# Altium PCB PCB.PcbDoc
Units mm, origin at the board's own origin, x right, y up, seen from the top; angles counter-clockwise.
Board outline 85.09 x 55.88 mm, 2 copper layers (Top Layer, Bottom Layer); 11 components, 11 nets, 57 pads, 23 vias.
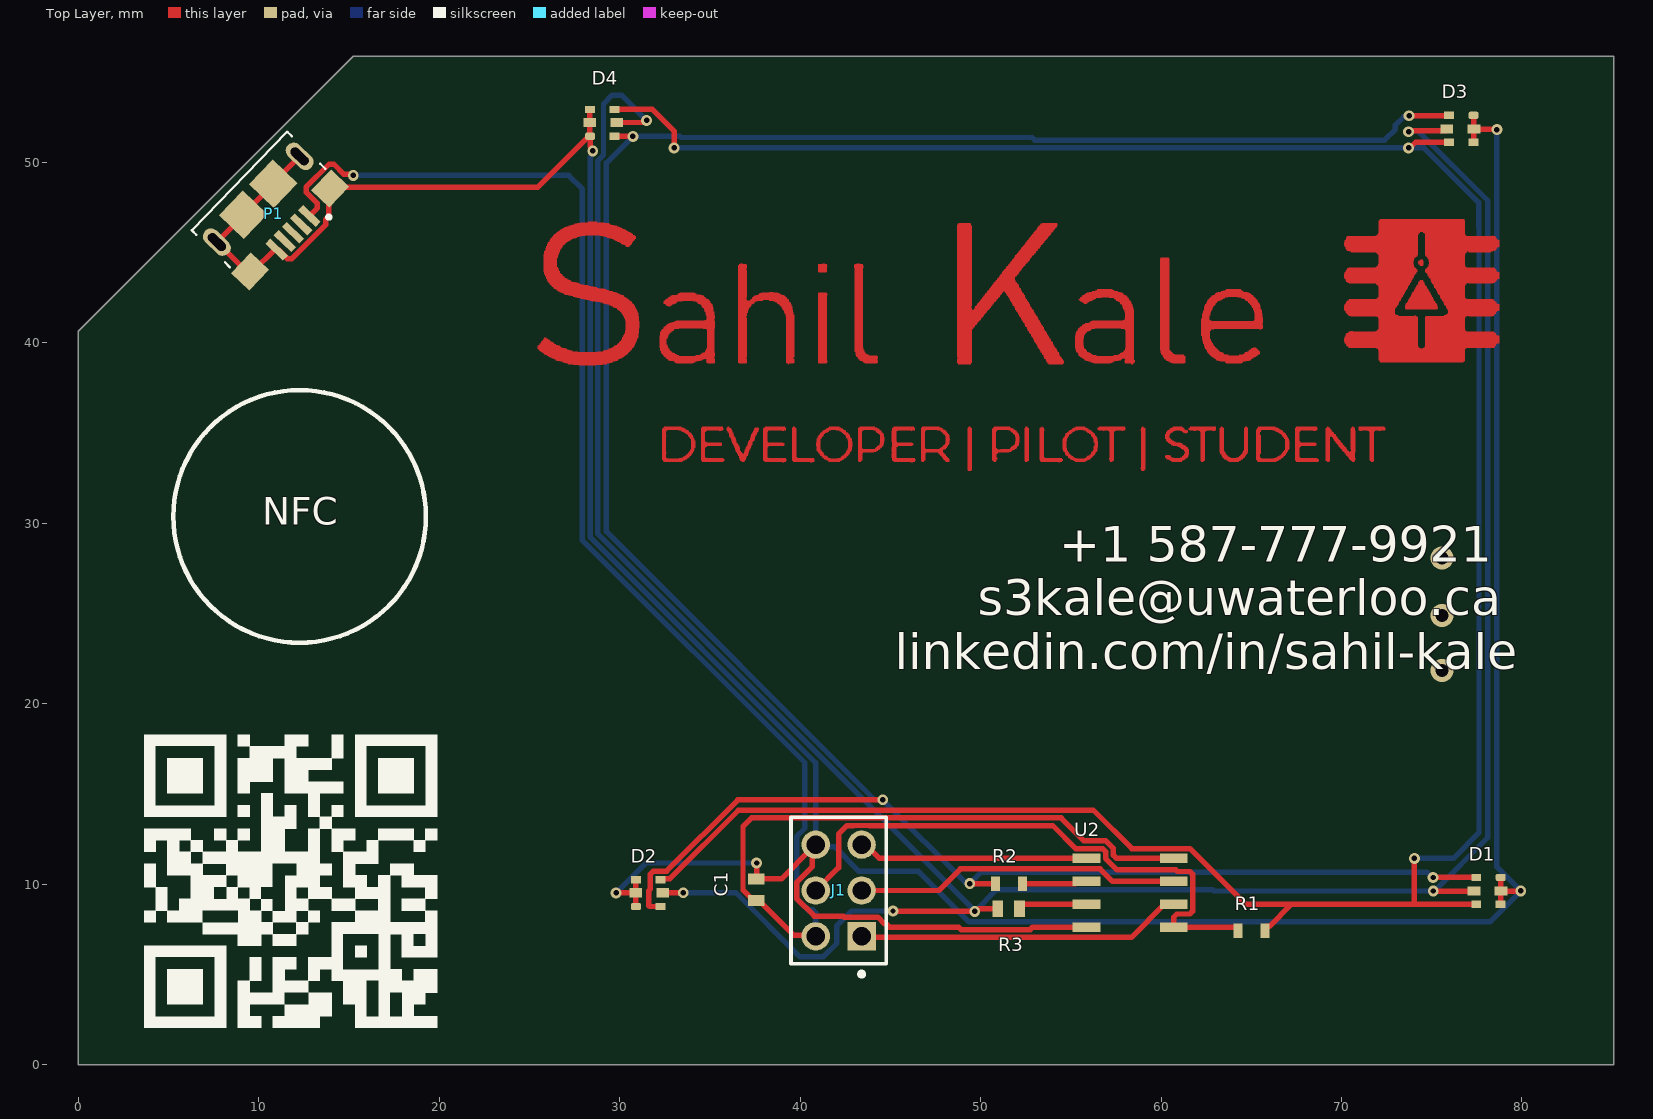
[diagram p0: Top Layer view]
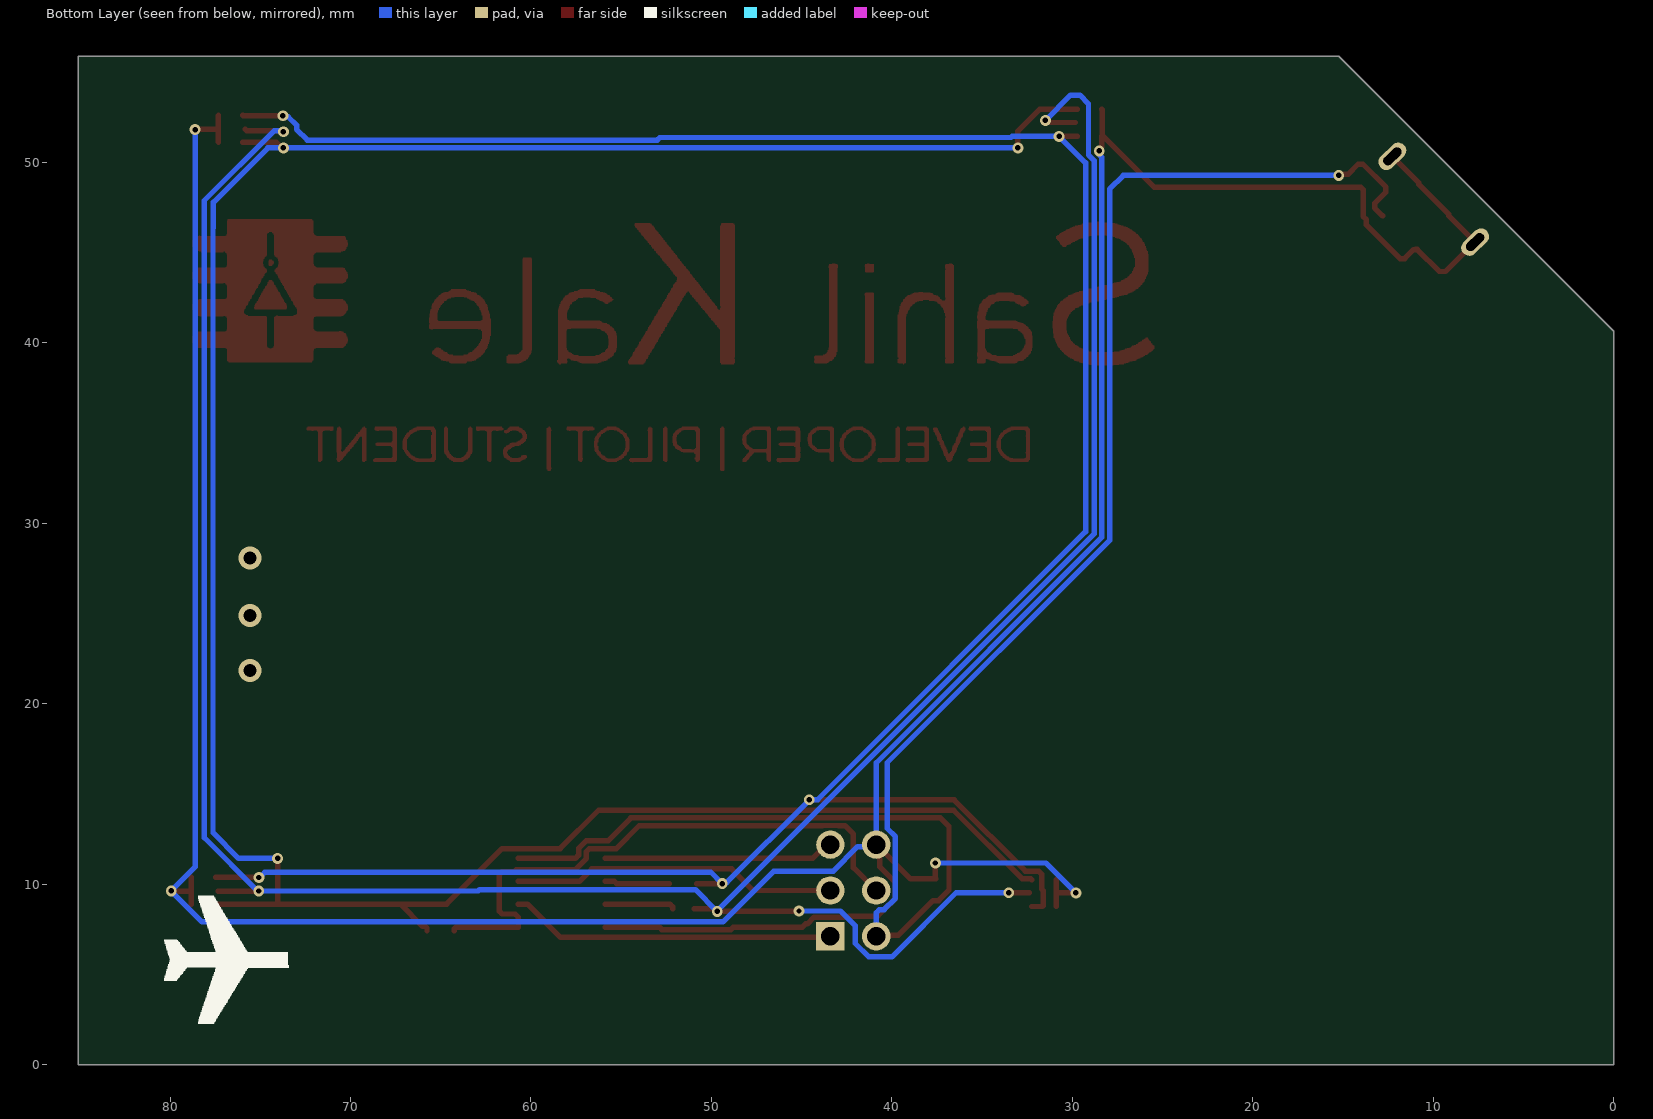
[diagram p1: Bottom Layer view, seen from below]
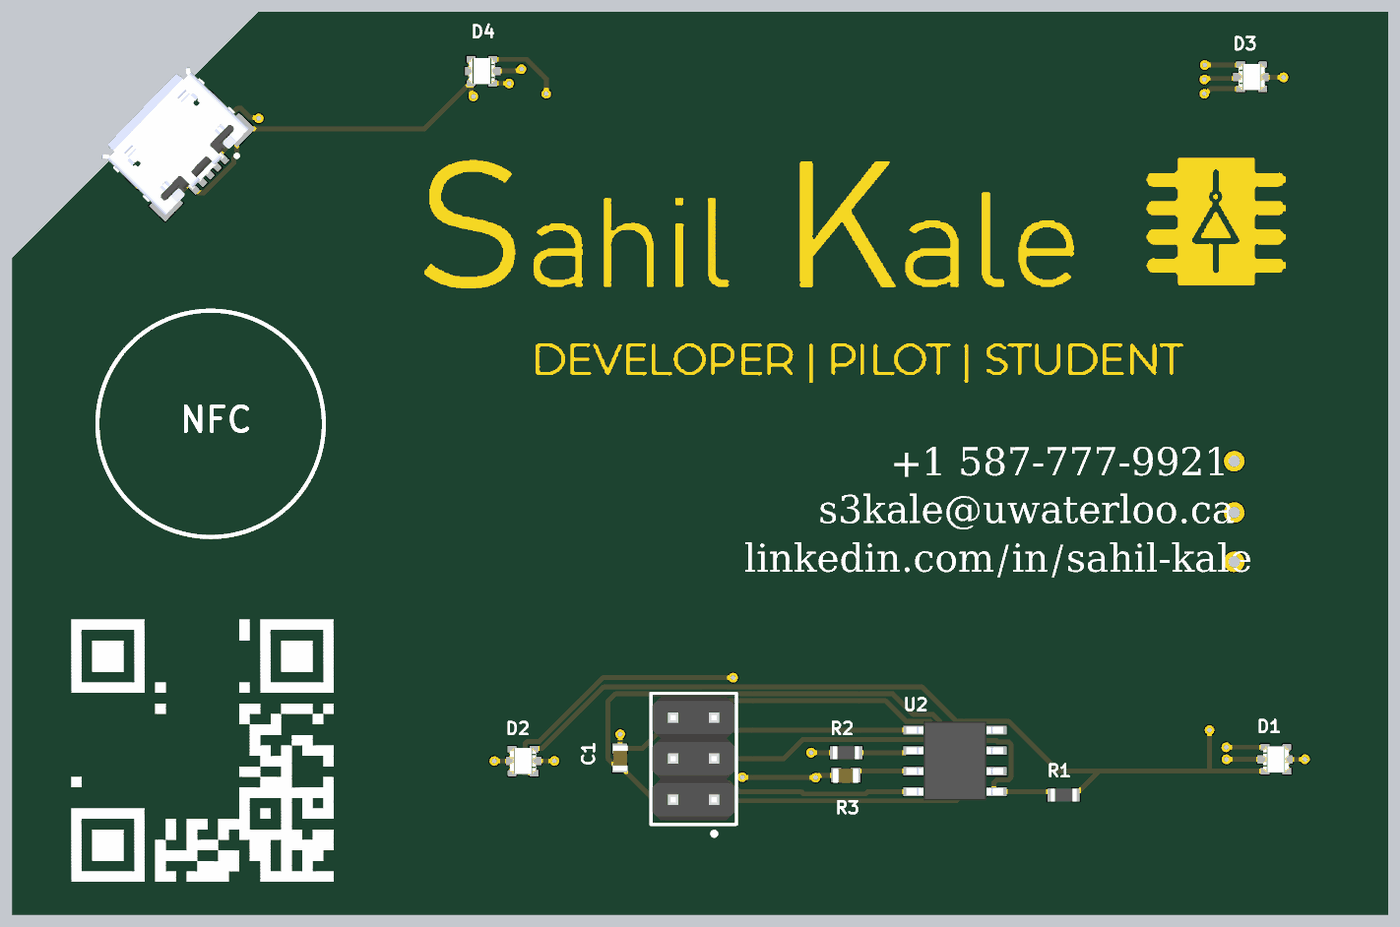
[diagram p2: 3D render of the assembled board from above, using the file's embedded part models]

## Layer stack, top to bottom
Top Solder: solder mask 0.0102, Solder Resist, Dk 3.5
Top Layer: signal copper 0.0356
Dielectric 1: dielectric 0.32, FR-4, Dk 4.8
Bottom Layer: signal copper 0.0356
Bottom Solder: solder mask 0.0102, Solder Resist, Dk 3.5

## Board outline
85.09,0 0,0 0,40.64 15.24,55.88 85.09,55.88

## Design rules (kind name [scope] priority, off if disabled: settings)
BoardOutlineClearance [All] p1: gap=0.2 ignorepadtopadclearanceinfootprint=FALSE
Clearance [All] p1: gap=0.127 ignorepadtopadclearanceinfootprint=FALSE except(0.25: Arc-Hole Track-Hole SMDPad-Hole THPad-Hole Via-Hole Fill-Hole Poly-Hole Region-Hole Text-Hole)
ComponentClearance [All] p1: gap=0.127 collisioncheckmode=3 verticalgap=0.127 showdistances=TRUE
DiffPairsRouting [All] p1: maxlimit=0.254 minlimit=0.127 mostfreqgap=0.127 toplayer_minwidth=0.127 toplayer_maxwidth=25.4 toplayer_prefwidth=0.127 bottomlayer_minwidth=0.127 bottomlayer_maxwidth=25.4 bottomlayer_prefwidth=0.127 maxuncoupledlength=12.7
Height [All] p1: minheight=0 maxheight=1816.048 prefheight=12.7
HoleSize [All] p1: absolutevalues=TRUE maxlimit=6.3 minlimit=0.3 maxpercent=80.000 minpercent=20.000
HoleToHoleClearance [All] p1: gap=0.25 allowstackedmicrovias=FALSE
MinimumAnnularRing [All] p1: minimumring=0.076
MinimumSolderMaskSliver [All] p1: minsoldermaskwidth=0
PlaneClearance [All] p1: clearance=0.127
PlaneConnect PlaneConnectPowerPads [InPadClass('PowerPads')] p1: planeconnectstyle=Direct reliefexpansion=0.508 reliefentries=4 reliefconductorwidth=0.254 reliefairgap=0.254
PlaneConnect [All] p2: pad.planeconnectstyle=Relief pad.reliefexpansion=0.3 pad.reliefentries=4 pad.reliefconductorwidth=0.127 pad.reliefairgap=0.127 via.planeconnectstyle=Direct via.reliefexpansion=0.3 via.reliefentries=4 via.reliefconductorwidth=0.127 via.reliefairgap=0.127
PolygonConnect PolygonConnectPowerPads [All vs (InPadClass('PowerPads'))] p1: connectstyle=Direct reliefconductorwidth=0.254 reliefentries=4 polygonreliefangle="90 Angle" airgapwidth=0.254
PolygonConnect [All] p2: thpad.connectstyle=Relief thpad.reliefconductorwidth=0.127 thpad.reliefentries=4 thpad.polygonreliefangle="90 Angle" thpad.airgapwidth=0.127 smdpad.connectstyle=Relief smdpad.reliefconductorwidth=0.127 smdpad.reliefentries=4 smdpad.polygonreliefangle="90 Angle" smdpad.airgapwidth=0.127 via.connectstyle=Direct via.reliefconductorwidth=0.127 via.reliefentries=4 via.polygonreliefangle="90 Angle" via.airgapwidth=0.127
RoutingVias [All] p1: holewidth=0.3 width=0.6 viastyle="Through Hole" minholewidth=0.3 minwidth=0.6 maxholewidth=0.6 maxwidth=6.6
SilkToSilkClearance [All] p1: silktosilkclearance=0
SilkToSolderMaskClearance [IsPad] p1: minsilkscreentomaskgap=0.127 clearancetoexposedcopper=TRUE
SolderMaskExpansion [All] p1: expansion=0.075 istentingtop=FALSE
Width [All] p1: maxlimit=25.4 minlimit=0.127 preferedwidth=0.127 minimp=50.000000 maximp=50.000000 favimp=50.000000
20 further rules are at their usual default settings.

## Classes and differential pairs
component class "SH1 - Main": C1 D1 D2 D3 D4 J1 R1 R2 R3 U2

## Components (designator, comment, footprint, x,y, rotation, side; value= is the part's Value field where it differs from the comment)
C1 "0603" 0603 37.567,10.293 r270 top
D1 "RGB LED" 19-337C/RSBHGHC-A88/4T 77.47,10.377 r0 top
D2 "RGB LED" 19-337C/RSBHGHC-A88/4T 32.258,8.763 r180 top
D3 "RGB LED" 19-337C/RSBHGHC-A88/4T 75.968,52.603 r0 top
D4 "RGB LED" 19-337C/RSBHGHC-A88/4T 29.718,51.447 r180 top
J1 "M20-9980346" FP-M20-9980346-MFG 42.139,9.652 r90 top
P1 "Micro Type B" FCI_10118193-0001LF 10.94,47.026 r226 top
R1 "0603" SDR03EZPJ200 64.262,7.417 r0 top
R2 "0603" SDR03EZPJ200 52.324,10.033 r180 top
R3 "0603" 0603 52.152,8.636 r180 top
U2 "ATTiny85" SOIC127P798X216-8N 55.88,11.43 r0 top

## Footprints (in the part's own frame and the unit in brackets; to place one, negate y for a bottom-side part, rotate by r counter-clockwise, add the part's x,y. Pads: shape width x height; smd on the part's side, far side on the other; paste and mask are expansions set on the pad)
19-337C/RSBHGHC-A88/4T [mm]
  rrect50% 0.55x0.4 smd: 1(1.35,0)
  rect 0.55x0.4 smd: 2(0,0) 5(1.35,-1.487) 6(0,-1.487)
  rect 0.7x0.5 smd: 3(1.373,-0.762) 4(-0.127,-0.762)
  body extent -0.13,-1.56 1.47,0.04, height 0.5
0603 [mm]
  rect 0.6x0.9 smd: 1(0,0) 2(1.2,0)
  body extent -0.19,-0.42 1.41,0.48, height 0.78
FCI_10118193-0001LF [mm]
  rect 0.4x1.35 smd: 1(-1.3,1.337) 2(-0.65,1.337) 3(0,1.338) 4(0.65,1.337) 5(1.3,1.337)
  rect 1.6x1.4 smd: S1(-3.2,1.113) S2(3.2,1.113)
  rect 1.9x1.9 smd: S3(1.2,-1.338) S4(-1.2,-1.338)
  oval 0.9x1.8 hole 0.5 slot 1.2 at 90 deg: S5(-3.3,-1.338) S6(3.3,-1.338)
  silkscreen extent -3.8,-2.79 3.8,2.26, body extent -3.94,-4.07 3.92,1.64, height 2.8
FP-M20-9980346-MFG [mm]
  rect 1.57x1.57 hole 1.02 paste-1000 mask+0: 1(-2.54,-1.27)
  round 1.57 hole 1.02 paste-1000 mask+0: 2(-2.54,1.27) 3(0,-1.27) 4(0,1.27) 5(2.54,-1.27) 6(2.54,1.27)
  silkscreen extent -4.76,-2.64 4.06,2.64, body extent -4.16,-2.74 4.16,2.74, height 0.25
SDR03EZPJ200 [mm]
  rect 0.5x0.8 smd: 1(0,0) 2(1.5,0)
  body extent -0.04,-0.4 1.56,0.4, height 0.55
SOIC127P798X216-8N [mil]
  rect 61x21 smd: 1(0,0) 2(0,-50) 3(0,-100) 4(0,-150) 5(190,-150) 6(190,-100) 7(190,-50) 8(190,0)
  body extent -23,-171 213,21, height 69

## Part data
C1: library part "CAP 0.1uF", "Ceramic Capacitor, Multilayer, Ceramic, 16V, 10% +Tol, 10% -Tol, X5R, 15% TC, 0.1uF, Surface Mount, 0603", Capacitance=100nF, Capacitor Type=Ceramic, Manufacturer="Taiyo Yuden", Manufacturer Part Number=EMK107BJ104KAHT, Max Operating Temperature=85°C, Min Operating Temperature=-55°C, Negative Tolerance=10%, Package Shape=Rectangular, Package Style=SMTMeter, Rated DC Voltage (URdc)=16V, Supplier Part Number 1=587-3308-1-ND, Temperature Characteristics Code=X5R, Category="Ceramic Capacitors", ComponentLink1Description=https://datasheet.ciiva.com:443/pdfs/VipMasterIC/IC/TAIY/TAIY-S-A0009098652/TAIY-S-A0009098054-1.pdf?src-supplier=IHS+Markit, ComponentLink1URL=https://datasheet.ciiva.com:443/pdfs/VipMasterIC/IC/TAIY/TAIY-S-A0009098652/TAIY-S-A0009098054-1.pdf?src-supplier=IHS+Markit, ComponentLink2Description=http://www.mouser.com/ds/2/396/mlcc11_hq_e-541564.pdf?src-supplier=Mouser, ComponentLink2URL=http://www.mouser.com/ds/2/396/mlcc11_hq_e-541564.pdf?src-supplier=Mouser, ComponentLink3Description=http://ds.yuden.co.jp/TYCOMPAS/ut/detail.do?productNo=EMK107BJ104KAHT&fileName=EMK107BJ104KAHT_SS&mode=specSheetDownload&src-supplier=Digi-Key, ComponentLink3URL=http://ds.yuden.co.jp/TYCOMPAS/ut/detail.do?productNo=EMK107BJ104KAHT&fileName=EMK107BJ104KAHT_SS&mode=specSheetDownload&src-supplier=Digi-Key, ComponentLink4Description=http://www.yuden.co.jp/ut/product/category/capacitor/putpdf/EMK107BJ104KAHT.pdf?src-supplier=Avnet, ComponentLink4URL=http://www.yuden.co.jp/ut/product/category/capacitor/putpdf/EMK107BJ104KAHT.pdf?src-supplier=Avnet, Dielectric Material=Ceramic, Height=0.8mm, Length=1.6mm, Mount="Surface Mount", Multilayer=Yes, Number of Pins=2, Packaging="Tape and Reel", Positive Tolerance=10%, Reference Standard=AEC-Q200, RoHS=Yes, Size Code=0603, Stock 1=65712, Supplier 1=Digi-Key, Termination=Wraparound, Width=0.8mm
D1 D2 D3 D4: library part LED_RGB, "Tri Color Pcb Top View SMD Led R", Manufacturer=Everlight, Manufacturer Part Number=19-337C/RSBHGHC-A88/4T, Supplier Part Number 1=1080-1631-1-ND, Category=LEDs, Pricing 1="1=0.40000, 10=0.24400, 100=0.14030, 1000=0.10980, 2000=0.10065 (USD)", RoHS=No, Stock 1=109225, Supplier 1=Digi-Key
J1: library part CMP-2000-06636-2, "CONN HEADER VERT 6POS 2.54MM", Current Rating=3A, Manufacturer=Harwin, Temperature="-40°C to +105°C", Temperature Range High=+105°C, Temperature Range Low=-40°C, Automotive=No, Category=Conn, ComponentLink2Description=Datasheet, ComponentLink2URL=https://cdn.harwin.com/pdfs/M20-998.pdf, Conn Gender=Male, Conn Orientation=Vertical, Contact Material=Tin,Nickel, Device Class L1=Connectors, Device Class L2="Headers and Wire Housings", Device Class L3=unset, Digikey Description="CONN HEADER VERT 6POS 2.54MM", Height=8.99mm, Lead Free=Yes, Manufacturer Part Number=M20-9980346, Mouser Description="2.54mm (0.1\") Pitch DIL Vertical PC Tail Pin Header, 6.1mm mating pin height, tin, 3+3 contacts", Number of Contacts=6, Number of Rows=2, Octopart=https://octopart.com/m20-9980346-harwin-5436545, Package=M20-9980346, Pitch=2.54mm, RoHS=TRUE
P1: library part "USB Connector", "USB Connector, 5 Contact(s), Female, Right Angle, Solder Terminal, Locking, Receptacle", Contact Resistance=30mR, Flammability Rating="UL94 V-0", Insulation Resistance=1GR, Manufacturer="Amphenol FCI", Manufacturer Part Number=10118193-0001LF, Manufacturer Series=10118193, Rated Current (Signal)=1.8A, Supplier Part Number 1=609-4616-1-ND, Board Mounting Option="LOCATING POSTS", Body Breadth=0.122inch, Body Depth=0.199inch, Body Length=0.309inch, Body/Shell Style=RECEPTACLE, Category="USB Connectors", ComponentLink1Description=https://datasheet.ciiva.com:443/pdfs/VipMasterIC/IC/FRCI/FRCI-S-A0000088532/FRCI-S-A0001133856-1.pdf?src-supplier=IHS+Markit, ComponentLink1URL=https://datasheet.ciiva.com:443/pdfs/VipMasterIC/IC/FRCI/FRCI-S-A0000088532/FRCI-S-A0001133856-1.pdf?src-supplier=IHS+Markit, ComponentLink2Description=https://datasheet.ciiva.com/851/10118193-851106.pdf?src-supplier=Digi-Key, ComponentLink2URL=https://datasheet.ciiva.com/851/10118193-851106.pdf?src-supplier=Digi-Key, ComponentLink3Description=https://datasheet.ciiva.com/26853/getdatasheetpartid-418618-26853893.pdf?src-supplier=Verical, ComponentLink3URL=https://datasheet.ciiva.com/26853/getdatasheetpartid-418618-26853893.pdf?src-supplier=Verical, ComponentLink4Description=https://datasheet.ciiva.com/4598/10118193ac-197151-4598799.pdf?src-supplier=Mouser, ComponentLink4URL=https://datasheet.ciiva.com/4598/10118193ac-197151-4598799.pdf?src-supplier=Mouser, ComponentLink5Description=https://datasheet.ciiva.com/14802/10118193-0001lf-webpage-14802386.pdf?src-supplier=Arrow+Electronics, ComponentLink5URL=https://datasheet.ciiva.com/14802/10118193-0001lf-webpage-14802386.pdf?src-supplier=Arrow+Electronics, ComponentLink6Description=https://datasheet.ciiva.com/851/10118193-851107.pdf?src-supplier=Digi-Key, ComponentLink6URL=https://datasheet.ciiva.com/851/10118193-851107.pdf?src-supplier=Digi-Key, ComponentLink7Description=https://datasheet.ciiva.com/851/10118193-851108.pdf?src-supplier=Digi-Key, ComponentLink7URL=https://datasheet.ciiva.com/851/10118193-851108.pdf?src-supplier=Digi-Key, ComponentLink8Description=https://datasheet.ciiva.com/14618/70236827-14618887.pdf?src-supplier=Allied+Electronics, ComponentLink8URL=https://datasheet.ciiva.com/14618/70236827-14618887.pdf?src-supplier=Allied+Electronics, Connector Type="TELECOM AND DATACOM CONNECTOR", Contact Finish - Mating="GOLD (30) OVER NICKEL", Contact Finish - Termination="GOLD FLASH OVER NICKEL", Contact Gender=Female, Contact Material="Copper Alloy", Contact Style=USB, DIN Conformance=No, Durability=10000Cycles, Empty Shell=No, Filter Feature=No, IEC Conformance=No, Insertion Force-Max=35.1392N, Insulation Material=Polymer, JESD-609 Code=e4, Mating Information="MULTIPLE MATING PARTS AVAILABLE", MIL Conformance=No, Mixed Contacts=No, Mount=Board, Mounting Option 1=LOCKING, Mounting Style="RIGHT ANGLE", Number Of Connectors=1, Number of Contacts=5, Number Of PCB Rows=1, Option="General Purpose", PCB Contact Pattern=RECTANGULAR, Plating Thickness=30uin, Polarization Key="POLAR PIN POSITION", Pricing 1="1=0.45000, 10=0.43000, 25=0.36840, 50=0.31320, 100=0.30090, 250=0.27016, 500=0.25788 (USD)", Reference Standard=UL, Reliability=COMMERCIAL, RoHS=Yes, Shell Finish=Tin, Shell Material="Stainless Steel", Stock 1=43659, Supplier 1=Digi-Key, Terminal Pitch=0.6604mm, Termination=Solder
R1 R2: library part "RES 120Ω", "Fixed Resistor, 0.1W, 120ohm, 50V, 5% +/-Tol, 200ppm/Cel, Surface Mount, 0603", Manufacturer=Rohm, Manufacturer Part Number=SDR03EZPJ121, Resistance=120Ω, Supplier Part Number 1=511-1735-1-ND, Category="Chip SMD Resistors", ComponentLink1Description=https://datasheet.ciiva.com:443/pdfs/VipMasterIC/IC/ROHM/ROHM-S-A0002832543/ROHM-S-A0002832543-1.pdf?src-supplier=IHS+Markit, ComponentLink1URL=https://datasheet.ciiva.com:443/pdfs/VipMasterIC/IC/ROHM/ROHM-S-A0002832543/ROHM-S-A0002832543-1.pdf?src-supplier=IHS+Markit, ComponentLink2Description=https://www.rohm.com/datasheet/SDR03EZPJ/sdr-e?src-supplier=Digi-Key, ComponentLink2URL=https://www.rohm.com/datasheet/SDR03EZPJ/sdr-e?src-supplier=Digi-Key, Pricing 1="1=0.10000, 10=0.07300, 100=0.02800, 1000=0.01232, 2500=0.01064 (USD)", RoHS=No, Stock 1=4798, Supplier 1=Digi-Key
R3: library part "RES 150Ω", "Fixed Resistor, Metal Glaze/thick Film, 0.1W, 150ohm, 75V, 5% +/-Tol, 200ppm/Cel, Surface Mount, 0603", Manufacturer=Vishay, Manufacturer Part Number=CRCW0603150RJNEAC, Max Operating Temperature=155°C, Min Operating Temperature=-55°C, Package Height=0.45mm, Package Length=1.6mm, Package Style=SMTMeter, Package Width=0.8mm, Rated Power Dissipation (P)=100mW, Resistance=150Ω, Resistor Type="FIXED RESISTOR", Supplier Part Number 1=541-CRCW0603150RJNEACCT-ND, Temperature Coefficient=-200200ppm/°C, Tolerance=5%, Working Voltage=75V, Category="Chip SMD Resistors", ComponentLink1Description=https://datasheet.ciiva.com:443/pdfs/VipMasterIC/IC/VISH/VISH-S-A0003599164/VISH-S-A0003599164-1.pdf?src-supplier=IHS+Markit, ComponentLink1URL=https://datasheet.ciiva.com:443/pdfs/VipMasterIC/IC/VISH/VISH-S-A0003599164/VISH-S-A0003599164-1.pdf?src-supplier=IHS+Markit, ComponentLink2Description=http://www.vishay.com/docs/28773/crcwce3.pdf?src-supplier=Digi-Key, ComponentLink2URL=http://www.vishay.com/docs/28773/crcwce3.pdf?src-supplier=Digi-Key, Construction=Chip, JESD-609 Code=e3, Number of Pins=2, Packaging="Tape and Reel", RoHS=Yes, Size Code=0603, Stock 1=59770, Supplier 1=Digi-Key, Technology="METAL GLAZE/THICK FILM", Terminal Finish=Nickel
U2: "RISC Microcontroller, 8-Bit, FLASH, AVR RISC CPU, 20MHz, CMOS, PDSO8", Manufacturer="Microchip / Atmel", Manufacturer Part Number=ATTINY85-20SH, Max Frequency=20MHz, Max Operating Temperature=85°C, Max Supply Current=8mA, Max Supply Voltage=5.5V, Min Operating Temperature=-40°C, Min Supply Voltage=4.5V, Package Body Material=Plastic, Package Code=SOP, Package Equivalence Code=SOP8,.3, Package Shape=Rectangular, Package Style="SMALL OUTLINEMeter", Power Supplies=3/5V, Supplier Part Number 1=ATTINY85-20SH-ND, Supply Voltage-Nom=5V, Temperature Grade=INDUSTRIAL, Category=Microcontrollers, ComponentLink1Description=https://datasheet.ciiva.com:443/pdfs/VipMasterIC/IC/ATML/ATMLS09344/ATMLS09344-1.pdf?src-supplier=IHS+Markit, ComponentLink1URL=https://datasheet.ciiva.com:443/pdfs/VipMasterIC/IC/ATML/ATMLS09344/ATMLS09344-1.pdf?src-supplier=IHS+Markit, ComponentLink2Description=https://datasheet.ciiva.com/9235/doc2586-9235500.pdf?src-supplier=Avnet, ComponentLink2URL=https://datasheet.ciiva.com/9235/doc2586-9235500.pdf?src-supplier=Avnet, Height - Seated (Max)=2.16mm, JESD-30 Code=R-PDSO-G8, Length=5.29mm, Number of I/O Lines=6, Number of Pins=8, Qualification Status="Not Qualified", RoHS=Yes, Speed=20RPM, Stock 1=1154, Supplier 1=Digi-Key, Surface Mount=Yes, Technology=CMOS, Terminal Form="Gull Wing", Terminal Pitch=1.27mm, Terminal Position=DUAL, Width=5.24mm

## Via types
v1: diameter 0.6, hole 0.3, Top Layer to Bottom Layer, 20 vias
v2: diameter 1.27, hole 0.711, Top Layer to Bottom Layer, 3 vias

## Nets (pads, with @x,y where several pads share a name; then routed paths per layer and width w, separated by ;. In a path a pad name is that pad's centre, name@x,y a point inside that pad or via, vN(x,y) a via of type N, cw(c..) or ccw(c..) an arc to the next point about the centre after c; other vN are vias at no path point)
GND: C1.1 D1.1 D1.3 D1.5 D2.1 D2.3 D2.5 D3.1 D3.3 D3.5 D4.1 D4.3 D4.5 J1.6 P1.5 P1.S1 P1.S2 P1.S3 P1.S4 P1.S5 P1.S6 U2.4 | length 204.3
  Top Layer w0.3: P1.S6 P1.S6@7.696,45.581 ; P1.S5 12.258,50.329 10.811,48.882 P1.S4 10.811,48.788 9.144,47.121 P1.S3 9.144,47.029 P1.S6@7.696,45.581 ; D4.1 28.368,50.855 28.511,50.713 v1(28.511,50.631) ; D4.5 28.357,52.922 28.357,52.22 D4.3 28.345,51.497 28.295,51.447 28.293,51.447 25.471,48.624 14.032,48.624 13.893,48.485 13.893,47.008 13.706,46.821 13.706,46.534 11.834,44.662 11.586,44.662 11.086,45.161 P1.5 10.98,45.18 10.892,45.18 9.663,43.951 P1.S2 9.326,43.951 P1.S6@7.696,45.581 ; v1(29.809,9.518) 29.816,9.525 D2.3 ; D2.1 30.897,8.774 30.897,9.513 D2.3 ; D2.5 30.897,10.238 30.897,9.537 D2.3 ; v1(37.592,11.176) 37.592,10.319 C1.1 38.97,10.293 J1.6@40.672,11.995 ; J1.6 J1.6@40.672,11.995 ; U2.4 52.882,7.62 52.744,7.482 48.92,7.482 48.782,7.62 44.958,7.62 44.78,7.798 44.685,7.798 44.308,8.174 42.448,8.174 42.393,8.23 40.789,8.23 39.807,9.212 39.807,10.092 40.672,10.957 J1.6@40.672,11.995 ; D3.5 77.329,51.128 77.329,51.83 D3.3 ; D3.1 77.329,52.592 77.329,51.853 D3.3 ; v1(78.613,51.816) 78.6,51.829 77.353,51.829 D3.3 ; D1.5 78.831,8.902 78.831,9.603 D1.3 ; D1.1 78.831,10.366 78.831,9.627 D1.3 ; v1(79.939,9.628) 79.926,9.615 D1.3
  Bottom Layer w0.3: v1(28.511,50.631) 28.453,50.574 28.453,50.362 28.367,50.276 28.367,29.226 40.869,16.725 J1.6 40.985,12.076 41.899,12.076 43.261,10.714 46.563,10.714 49.363,7.914 78.225,7.914 v1(79.939,9.628) 78.613,10.953 v1(78.613,51.816) ; v1(29.809,9.518) 31.467,11.176 v1(37.592,11.176)
NetD1_2: D1.2 D2.2 D3.2 D4.2 R2.2 | length 144.7
  Top Layer w0.3: D4.2 29.724,51.441 30.728,51.441 v1(30.734,51.435) v1@30.763,51.406 ; D2.2 31.672,8.763 31.623,8.812 31.623,9.652 31.706,9.735 31.706,10.565 31.868,10.727 32.602,10.727 36.549,14.674 v1(44.577,14.674) ; v1(49.403,10.033) R2.2 ; v1(73.746,52.578) 73.759,52.591 75.955,52.591 D3.2 ; v1(75.076,10.37) 75.083,10.377 D1.2
  Bottom Layer w0.3: v1(73.746,52.578) 73.689,52.521 73.451,52.521 72.991,52.061 72.991,51.828 72.39,51.227 53.014,51.227 52.864,51.377 33.406,51.377 33.348,51.435 v1(30.734,51.435) 29.267,49.968 29.267,29.534 44.122,14.679 44.572,14.679 v1(44.577,14.674) 49.161,10.09 49.346,10.09 v1(49.403,10.033) 50.031,10.661 74.75,10.661 75.041,10.37 v1(75.076,10.37)
NetD1_4: D1.4 D2.4 D3.4 D4.4 R3.2 | length 156.1
  Top Layer w0.3: D4.4 31.299,52.209 31.415,52.324 v1(31.496,52.324) ; D2.4 v1(33.528,9.525) ; v1(45.151,8.515) 45.163,8.503 49.67,8.503 v1(49.682,8.491) 49.764,8.491 49.909,8.636 R3.2 ; v1(73.718,51.689) 73.775,51.746 75.746,51.746 D3.4 ; v1(75.087,9.622) 75.091,9.618 77.34,9.618 D1.4
  Bottom Layer w0.3: v1(31.496,52.324) 30.099,53.721 29.591,53.721 29.109,53.239 29.109,50.414 28.794,50.099 28.794,29.403 49.682,8.515 v1(49.682,8.491) 50.894,9.703 62.846,9.703 62.927,9.622 v1(75.087,9.622) 75.144,9.622 78.105,12.583 78.105,47.879 74.237,51.747 v1@73.988,51.747 ; v1(33.528,9.525) 36.449,9.525 40.005,5.969 41.275,5.969 42.034,6.728 42.034,7.699 42.85,8.515 v1(45.151,8.515) ; v1(73.718,51.689) 73.775,51.746 v1@73.988,51.746
NetD1_6: D1.6 D2.6 D3.6 D4.6 R1.2 | length 145.7
  Top Layer w0.3: D4.6 31.815,52.934 33.02,51.729 v1(33.02,50.8) ; D2.6 32.299,10.291 32.77,10.291 36.576,14.097 42.604,14.097 42.615,14.108 44.202,14.108 44.213,14.097 56.261,14.097 58.384,11.974 61.595,11.974 64.679,8.89 67.235,8.89 ; R1.2 65.762,7.567 65.862,7.667 66.012,7.667 67.235,8.89 ; v1(73.718,50.8) 73.799,50.8 74.116,51.116 D3.6 ; v1(74.041,11.43) 74.041,8.89 ; D1.6 74.041,8.89 ; 67.235,8.89 74.041,8.89
  Bottom Layer w0.3: v1(33.02,50.8) v1(73.718,50.8) 74.58,50.8 77.597,47.783 77.597,46.367 77.622,46.342 77.622,12.852 76.2,11.43 v1(74.041,11.43)
NetJ1_1: J1.1 U2.6 | length 18.1
  Top Layer w0.3: J1.1 43.466,7.055 58.363,7.055 60.198,8.89 U2.6
NetJ1_3: J1.3 U2.7 | length 18.1
  Top Layer w0.3: J1.3 47.691,9.652 48.885,10.846 56.627,10.846 57.313,10.16 U2.7
NetJ1_4: J1.4 R1.1 U2.5 | length 32.3
  Top Layer w0.3: J1.4 42.139,10.922 42.139,12.776 42.605,13.243 42.958,13.243 42.969,13.254 43.848,13.254 43.859,13.243 54.001,13.243 55.27,11.974 56.769,11.974 56.932,11.811 56.932,11.429 57.566,10.795 60.833,10.795 60.924,10.704 61.595,10.704 61.758,10.541 61.758,8.509 61.595,8.346 60.882,8.346 60.706,8.171 U2.5 64.162,7.62 64.262,7.52 R1.1
NetJ1_5: J1.5 U2.1 | length 12.8
  Top Layer w0.3: J1.5 43.631,12.192 44.393,11.43 U2.1
NetR2_1: R2.1 U2.2 | length 3.6
  Top Layer w0.3: R2.1 55.245,10.033 55.372,10.16 U2.2
NetR3_1: R3.1 U2.3 | length 3.9
  Top Layer w0.3: R3.1 52.152,8.74 52.302,8.89 U2.3
VCC: C1.2 J1.2 P1.1 U2.8 | length 99.6
  Top Layer w0.3: P1.1 13.251,47.478 13.251,47.726 12.627,48.351 12.627,48.62 13.9,49.894 14.164,49.894 14.724,49.333 15.183,49.333 v1(15.24,49.276) ; J1.2 40.804,7.176 39.634,7.176 37.717,9.093 C1.2 37.417,9.093 36.84,9.67 36.84,13.202 37.308,13.67 42.781,13.67 42.792,13.681 44.025,13.681 44.036,13.67 54.461,13.67 55.73,12.401 56.946,12.401 57.359,11.988 57.359,11.606 57.534,11.43 U2.8
  Bottom Layer w0.3: v1(15.24,49.276) 27.178,49.276 27.94,48.514 27.94,29.049 40.259,16.73 40.259,13.084 39.807,12.632 39.807,9.212 40.429,8.59 40.693,8.59 40.869,8.414 J1.2
pads on no net: P1.2 P1.3 P1.4
copper on no net:
  other v2: 75.565,21.844 75.565,24.892 75.565,28.067

## Other copper
Top Layer:
  drawing of 36 lines, arcs and shapes, not listed

## Silkscreen, mask and mechanical layers (free items; w line width, h text height)
Top Overlay:
  drawing of 19 lines, arcs and shapes, not listed
  text "NFC" at 10.211,29.921 h1.52
  text "+1 587-777-9921" at 54.356,27.202 h3.4
  text "s3kale@uwaterloo.ca" at 49.851,24.243 h3.4
  text "linkedin.com/in/sahil-kale" at 45.254,21.233 h3.4
Bottom Overlay:
  region: 672 vertices and 0 holes, not listed, extent 73.437,2.268 80.329,9.356
Top Solder:
  drawing of 36 lines, arcs and shapes, not listed

## Text inside footprints (layer, text, board x,y; h text height)
P1: Top 3D Body "PCB END" at 5.743,45.441 h0.41 r226